# EAGLE board 10w_CREE_LED_driver (EAGLE 6.2)
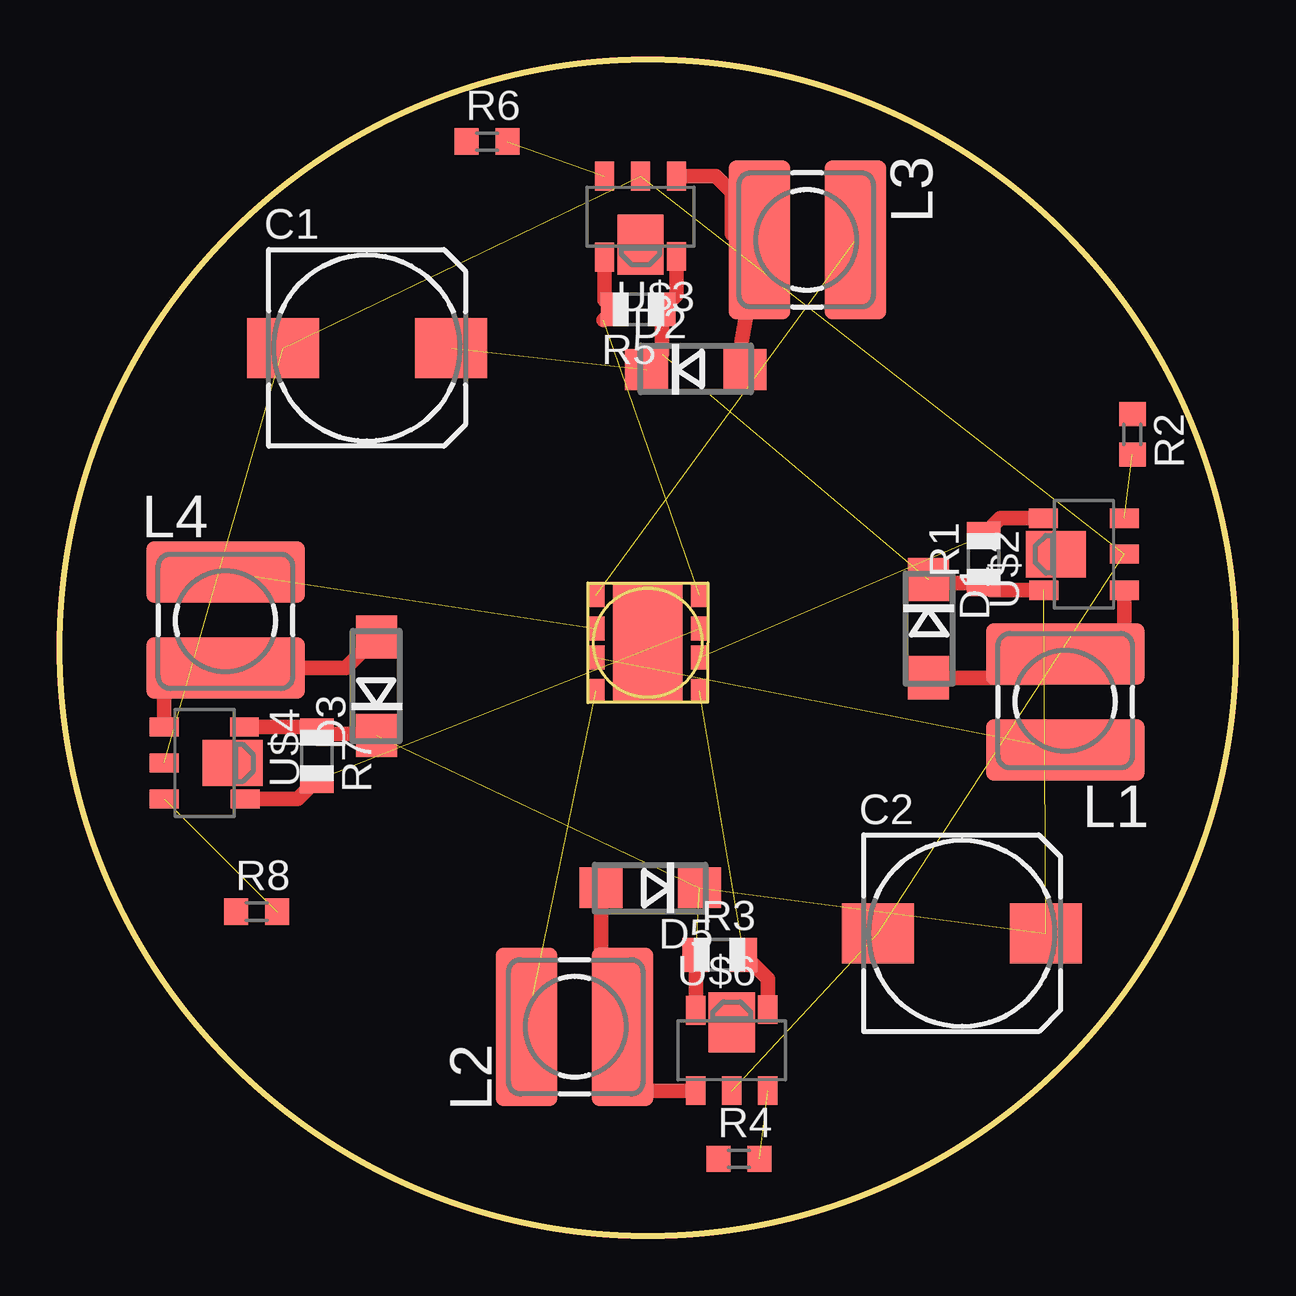
[diagram p0: board, top side]

Size 49 x 49 mm. Coordinates in mm from the lower left corner, seen from the top.
Outline: circle at 24.5,24.5 radius 24.5
Copper layers (1*16): Top 0.035mm / dielectric 1.5mm / Bottom 0.035mm
Design rules: minimum track width 8mil, minimum drill 20mil, track to track 8mil, track to pad 8mil, pad to pad 8mil, via to via 8mil, smd to smd 8mil, copper to edge 10mil, drill to drill 8mil, minimum pad ring 12mil, minimum via ring 10mil, stop-mask expansion 4mil, vias tented up to drill 25mil, thermal gap 10mil

## Footprints (pad centres in the part's own frame; a part is rotated, then mirrored left to right if it is on the bottom)
175TMP-0810 = smd 3 x 2.5: + 3.5,0; - -3.5,0
DO214AC = smd 1.8 x 1.7: A 2.05,0; C -2.05,0
TDK6045 = smd 6.6 x 2.55: 1 0,2.05; 2 0,-1.95
R0805 = smd 1.1 x 1.4: 1 -1,0; 2 1,0
R0603 = smd 1 x 1.1: 1 -0.85,0; 2 0.85,0
CREE_XLAMP_XML = smd 0.7 x 1: 1 2.15,2; 2 2.15,0.6; 3 2.15,-0.6; 4 2.15,-2; 5 -2.15,-2; 6 -2.15,-0.6; 7 -2.15,0.6; 8 -2.15,2 | smd 2.9 x 5: P$1 0,0
SOT89-5 = smd 0.8 x 1.2: 1 -1.5,-2.362; 2 0.001,-2.362; 3 1.5,-2.362; 4 1.5,1.016; 5 -1.5,0.991 | smd 1.93 x 2.5: THEM 0,0.488

## Placement (x,y rotation side)
C1  150uF  [175TMP-0810]  12.8,37 0 top
C2  150uF  [175TMP-0810]  37.6,12.6 0 top
D1  SCHOTTKY  [DO214AC]  36.2,25.3 270 top
D2  SCHOTTKY  [DO214AC]  26.5,36.1 0 top
D3  SCHOTTKY  [DO214AC]  13.2,22.9 90 top
D5  SCHOTTKY  [DO214AC]  24.6,14.5 180 top
L1  47uH  [TDK6045]  41.9,22.3 180 top
L2  47uH  [TDK6045]  21.5,8.7 90 top
L3  47uH  [TDK6045]  31.1,41.5 270 top
L4  47uH  [TDK6045]  6.9,25.6 0 top
R1  0.14  [R0805]  38.5,28.2 90 top
R2  10K  [R0603]  44.7,33.4 270 top
R3  0.14  [R0805]  27.5,11.7 0 top
R4  10K  [R0603]  28.3,3.2 0 top
R5  0.14  [R0805]  24.1,38.6 180 top
R6  10K  [R0603]  17.8,45.6 0 top
R7  0.14  [R0805]  10.7,20 270 top
R8  10K  [R0603]  8.2,13.5 0 top
U$1  CREE_XLAMP_RGBW  [CREE_XLAMP_XML]  24.5,24.7 0 top
U$2  ZLED7000-LEDDRIVER  [SOT89-5]  42,28.4 90 top
U$3  ZLED7000-LEDDRIVER  [SOT89-5]  24.2,41.8 180 top
U$4  ZLED7000-LEDDRIVER  [SOT89-5]  6.7,19.7 270 top
U$6  ZLED7000-LEDDRIVER  [SOT89-5]  28,8.4 0 top

## Library data of the parts
C1 C2 R1-R8 U$2-U$4 U$6 = adafruit
D1-D3 D5 = diode
L1-L4 = rcl
U$1 = led

## Nets
GND: C1.- C2.- U$2.2 U$3.2 U$4.2 U$6.2
N$1: R2.2 U$2.3
N$2: R2.1
N$3: R1.2 U$1.3 U$2.4
N$4: L2.1 U$1.5
N$5: D1.A L1.2 U$2.1
N$6: R3.2 U$1.4 U$6.4
N$7: D5.A L2.2 U$6.1
N$8: R4.2 U$6.3
N$9: R4.1
N$10: R5.2 U$1.1 U$3.4
N$11: D2.A L3.2 U$3.1
N$12: R6.2 U$3.3
N$13: R6.1
N$14: R7.2 U$1.2 U$4.4
N$15: D3.A L4.2 U$4.1
N$16: R8.2 U$4.3
N$17: R8.1
N$18: L1.1 U$1.6
N$19: L4.1 U$1.7
N$20: L3.1 U$1.8
VCC: C1.+ C2.+ D1.C D2.C D3.C D5.C R1.1 R3.1 R5.1 R7.1 U$2.5 U$3.5 U$4.5 U$6.5

## Tracks (layer width: path | path; a pad name or v marks a point on that pad's centre or on a via)
GND  (5 unrouted)
N$1  (1 unrouted)
N$3  (1 unrouted)
  Top 0.61: U$2.4 39.2,29.9 R1.2
N$4  (1 unrouted)
N$5
  Top 0.61: U$2.1 44.36,24.66 44.1,24.4 42.05,24.4 L1.2 40.9,23.25 D1.A
N$6  (1 unrouted)
  Top 0.61: U$6.4 29.5,10.7 R3.2
N$7
  Top 0.61: D5.A 22.55,9.6 L2.2 23.5,8.65 23.5,6.7 24.16,6.04 U$6.1
N$8  (1 unrouted)
N$10  (1 unrouted)
  Top 0.61: U$3.4 22.7,39 R5.2 22.65,38.15
N$11
  Top 0.61: U$3.1 27.34,44.16 28,43.5 28,41.75 L3.2 28.25,36.4 D2.A
N$12  (1 unrouted)
N$14  (1 unrouted)
  Top 0.61: U$4.4 9.9,18.2 R7.2
N$15
  Top 0.61: U$4.1 4.34,23.24 4.5,23.4 6.65,23.4 L4.2 11.9,23.65 D3.A
N$16  (1 unrouted)
N$18  (1 unrouted)
N$19  (1 unrouted)
N$20  (1 unrouted)
VCC  (6 unrouted)
  Top 0.61: U$4.5 10.5,21.2 R7.1 11,21 11.1,20.9 13.15,20.9 D3.C | U$6.5 R3.1 | U$2.5 38.8,26.9 R1.1 36.35,27.2 D1.C | U$3.5 25.7,39.2 R5.1 25.1,36.75 D2.C